# Altium PCB Sonar.PcbDoc
Units mil, origin at the board's own origin, x right, y up, seen from the top; angles counter-clockwise.
Board outline 6500 x 3000 mil, 2 copper layers (Top Layer, Bottom Layer); 61 components, 28 nets, 382 pads, 98 vias.
Unrouted connection lines stored in the file: 12.
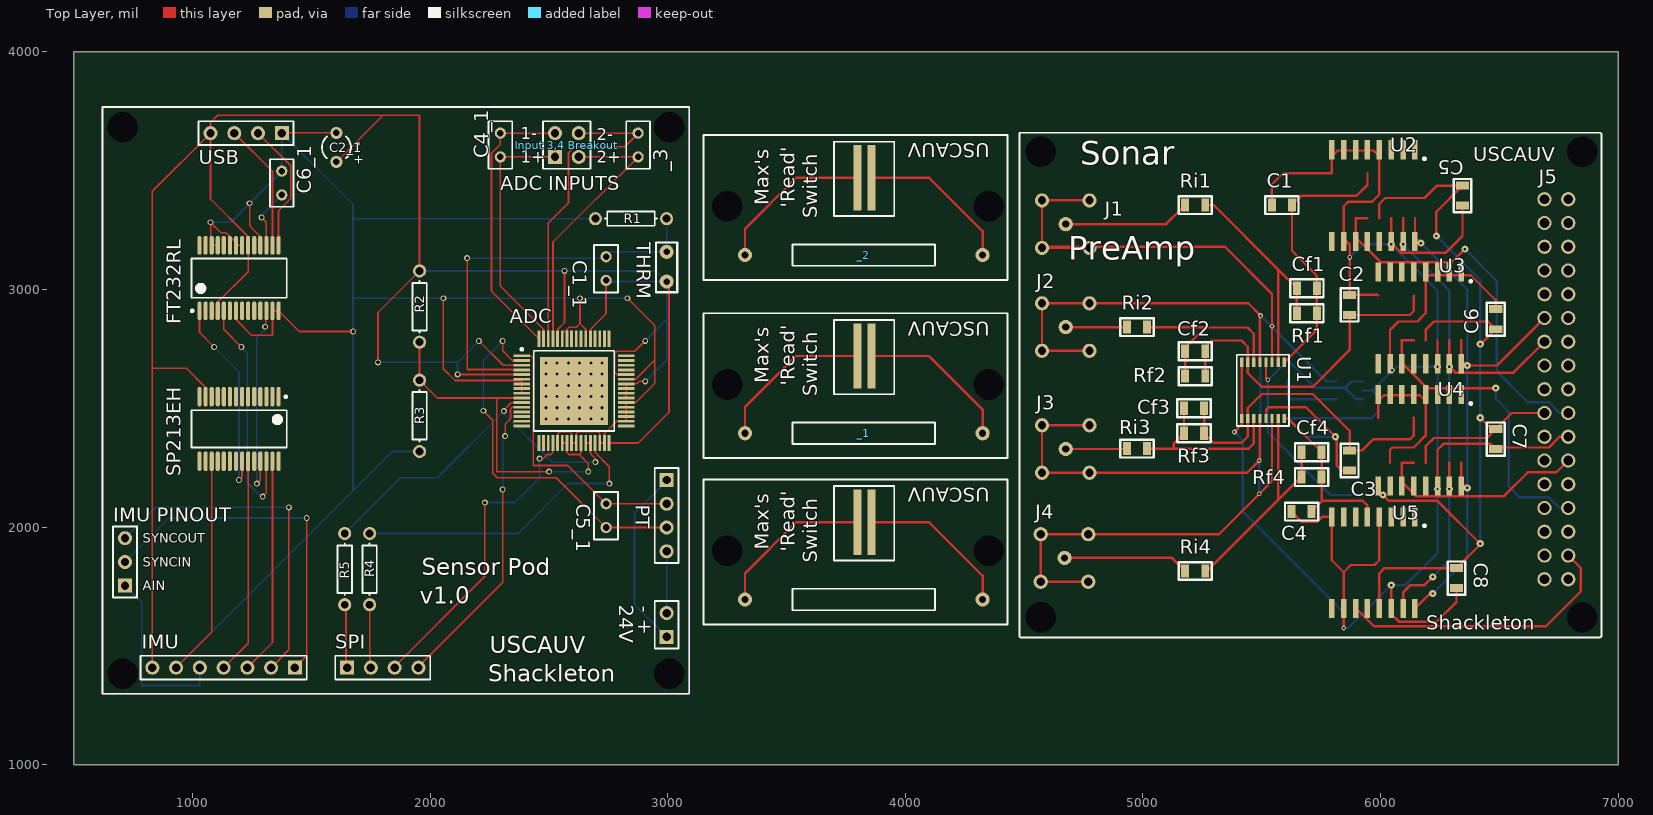
[diagram p0: Top Layer view]
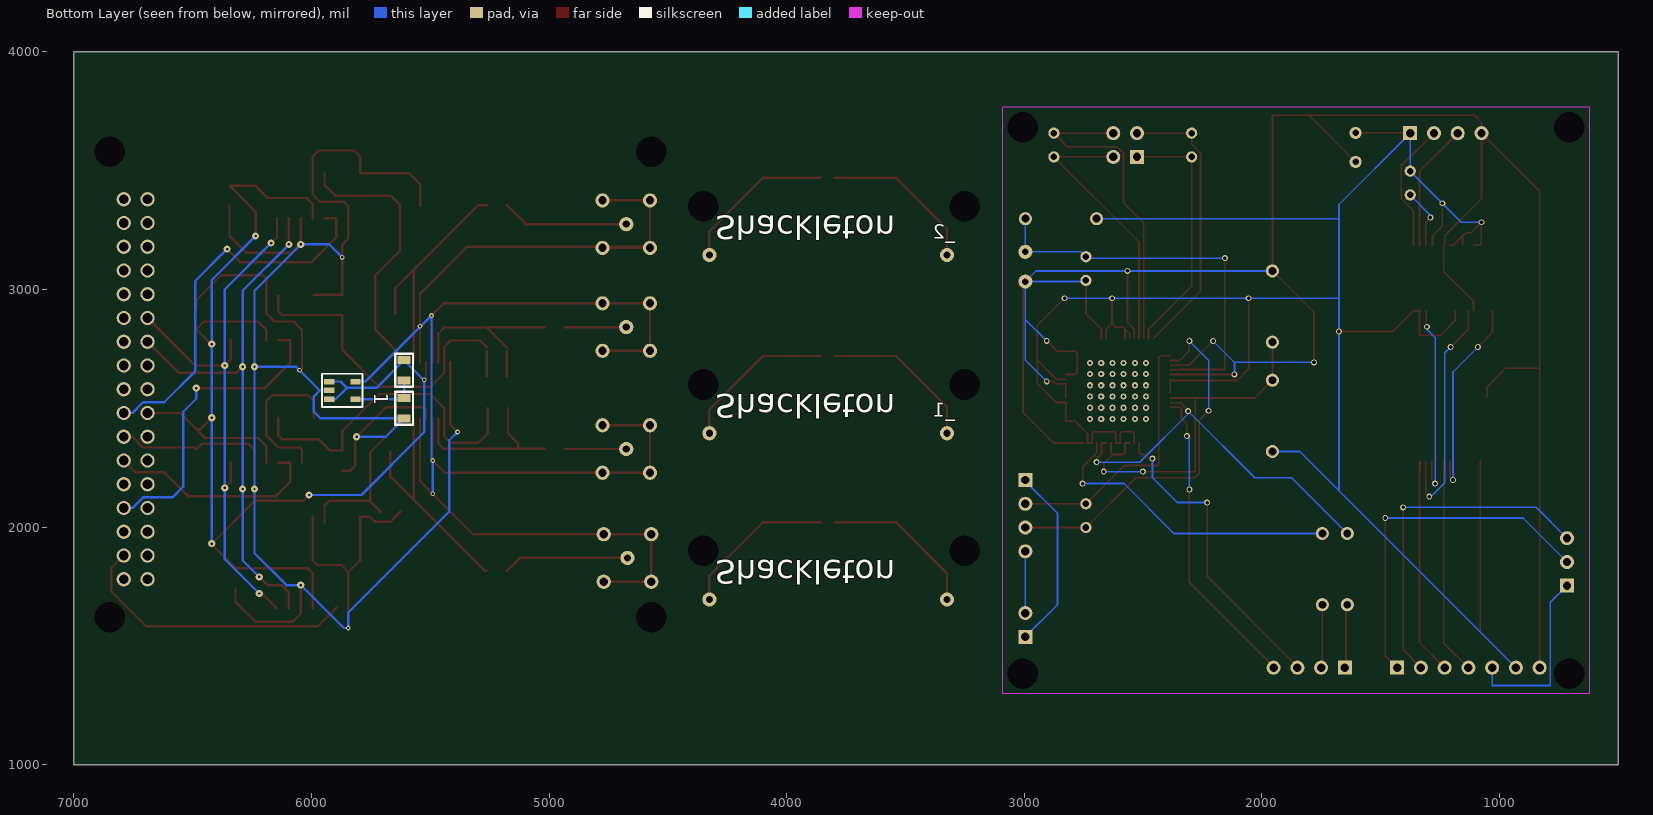
[diagram p1: Bottom Layer view, seen from below]

## Layer stack, top to bottom
Top Layer: signal copper 1.4
Dielectric: dielectric 12.6, FR-4, Dk 4.8
Bottom Layer: signal copper 1.4

## Board outline
500,1000 7000,1000 7000,4000 500,4000

## Design rules (kind name [scope] priority, off if disabled: settings)
Clearance [All] p1: gap=10
PolygonConnect [All] p1: connectstyle=Relief reliefconductorwidth=10 reliefentries=4 polygonreliefangle="90 Angle"
RoomDefinition Sonar [InComponentClass('Sonar')] p1: confinementstyle=ConfineIn formatcopy=TRUE lockcomponents=FALSE outline 7045,1060 11190,1060 11190,1260 7045,1260
RoutingVias [All] p1: holewidth=28 width=50 viastyle="Through Hole" minholewidth=28 minwidth=50 maxholewidth=28 maxwidth=50
SilkscreenOverComponentPads [All] p1: minsilkscreentomaskgap=10
SolderMaskExpansion [All] p1: expansion=4
Width [All] p1: maxlimit=10 minlimit=10 preferedwidth=10
27 further rules are at their usual default settings.

## Classes and differential pairs
component class Sonar: * C1 C2 C3 C4 C5 C6 C7 C8 Cf1 Cf2 Cf3 Cf4 J1 J2 J3 J4 J5 Rf1 Rf2 Rf3 Rf4 Ri1 Ri2 Ri3 Ri4 U1 U2 U4 U5

## Components (designator, comment, footprint, x,y, rotation, side; value= is the part's Value field where it differs from the comment)
1 "470K Ohm" "R 0805 (2012) RESISTOR" 5610,2500 r270 bottom (schematic designator Rf1)
"- +" "Header 2" HDR1X2 2995,1538 r90 top (schematic designator 24V)
_1 "" "MDCG-4 12-33" 3825,2395 r180 top
_2 "" "MDCG-4 12-33" 3825,3145 r180 top
_3 "Cap" RAD-0.1 2875,3608 r90 top (schematic designator C3)
ADC "ADC _ ADS1174" "ADC - ADS1174" 2605,2573 r0 top
C1 ".22uF" "0805 (2012) Capacitor" 5585,3355 r0 top
C1_1 "Cap" RAD-0.1 2740,3088 r270 top (schematic designator C1)
C2 ".22uF" "0805 (2012) Capacitor" 5870,2935 r270 top
C2_1 "Cap Pol1" R38 1605,3598 r180 top (schematic designator C2)
C3 ".22uF" "0805 (2012) Capacitor" 5870,2280 r90 top
C4 ".22uF" "0805 (2012) Capacitor" 5667.68,2065 r0 top
C4_1 "Cap" RAD-0.1 2295,3608 r90 top (schematic designator C4)
C5 "1uF" "0805 (2012) Capacitor" 6345,3395 r270 top
C5_1 "Cap" RAD-0.1 2740,2048 r90 top (schematic designator C5)
C6 "1uF" "0805 (2012) Capacitor" 6485,2875 r90 top
C6_1 "Cap" RAD-0.1 1375,3448 r270 top (schematic designator C6)
C7 "1uF" "0805 (2012) Capacitor" 6485,2370 r270 top
C8 "1uF" "0805 (2012) Capacitor" 6320,1785 r270 top
Cf1 ".1uF" "0805 (2012) Capacitor" 5690,3005 r0 top
Cf2 ".1uF" "0805 (2012) Capacitor" 5220,2740 r0 top
Cf3 ".1uF" "0805 (2012) Capacitor" 5215,2500 r0 top
Cf4 ".1uF" "0805 (2012) Capacitor" 5710,2315 r0 top
FT232RL "FT232RL" SSOP-28 1195,3048 r90 top (schematic designator RS232_to_USB)
IMU "Header 7" HDR1X7 1430,1408 r180 top (schematic designator IMU232Input)
IMU_BREAKOUT "Header 3" HDR1X3 715,1753 r90 top
"Input 3,4 Breakout" "Header 2X2" HDR2X2 2525,3558 r0 top
J1 "EPL.00.250.NTN" EPL.00.250.NTN_1 4675,3275 r0 top
J2 "EPL.00.250.NTN" EPL.00.250.NTN_1 4675,2841.67 r0 top
J3 "EPL.00.250.NTN" EPL.00.250.NTN_1 4675,2328.33 r0 top
J4 "EPL.00.250.NTN" EPL.00.250.NTN_1 4670,1870 r0 top
J5 "1001 34 G 00 B 1 A" 1001 6740,2580 r90 top
PT "Header 4" HDR1X4 2995,2198 r270 top (schematic designator Pressure_Transducer)
R1 "Res1" AXIAL-0.3 2845,3298 r0 top
R2 "Res1" AXIAL-0.3 1955,2928 r270 top
R3 "Res1" AXIAL-0.3 1955,2468 r270 top
R4 "Res1" AXIAL-0.3 1745,1823 r90 top
R5 "Res1" AXIAL-0.3 1640,1823 r90 top
Rf1 "0Ohm" "R 0805 (2012) RESISTOR" 5690,2900 r0 top
Rf1 "470K Ohm" "R 0805 (2012) RESISTOR" 5610,2660 r270 bottom
Rf2 "0Ohm" "R 0805 (2012) RESISTOR" 5220,2635 r0 top
Rf3 "0Ohm" "R 0805 (2012) RESISTOR" 5215,2395 r0 top
Rf4 "0Ohm" "R 0805 (2012) RESISTOR" 5710,2210 r0 top
Ri1 "0Ohm" "R 0805 (2012) RESISTOR" 5220,3355 r0 top
Ri2 "0Ohm" "R 0805 (2012) RESISTOR" 4975,2841.67 r0 top
Ri3 "0Ohm" "R 0805 (2012) RESISTOR" 4975,2330 r0 top
Ri4 "0Ohm" "R 0805 (2012) RESISTOR" 5220,1815 r0 top
SP213EH "SP213EH" SSOP-28(2) 1195,2413 r270 top (schematic designator Level_Converter)
SPI "Header 4" HDR1X4 1650,1408 r0 top (schematic designator SPI_OUT)
THRM "USP10981" Thermistor 2995,3003.41 r90 top (schematic designator Thermistor)
U1 "TLV2775" TlV2775AIPW 5505,2575 r270 top
U2 "PGA204" pGA204AU 5970,3395 r270 top
U3 "PGA204" pGA204AU 6165,2880 r270 top
U4 "PGA204" pGA204AU 6165,2365 r270 top (schematic designator U3)
U5 "PGA204" pGA204AU 5970,1850 r270 top
USB "Header 4" HDR1X4 1375,3658 r180 top (schematic designator USB_OUT)
? "" 5-1775443-2 3827,3470 r180 top
? "" 5-1775443-2 3827,2720 r180 top
? "" TC1071VCT713 5870,2575 r270 bottom
? "" 5-1775443-2 3827,2020 r180 top
? "" "MDCG-4 12-33" 3825,1695 r180 top

## Footprints (in the part's own frame and the unit in brackets; to place one, negate y for a bottom-side part, rotate by r counter-clockwise, add the part's x,y. Pads: shape width x height; smd on the part's side, far side on the other; paste and mask are expansions set on the pad)
5-1775443-2 [mm] "CONN HEADER 1.5MM 2 POS Vert SMD"
  rect 0.85x7 smd: 1(-0.75,0) 2(0.75,0)
  silkscreen extent -3.2,-3.86 3.25,4.09, body extent -2.25,-2.73 2.25,3.27, height 4.95
"0805 (2012) Capacitor" [mm] "0805 (2012) Capacitor"
  rect 0.85x1.4 smd: 1(-1.075,0) 2(1.075,0)
  silkscreen extent -1.78,-0.95 1.78,0.95, body extent -1.19,-0.65 1.19,0.65, height 0.85
1001 [mil] "OUPIIN"
  round 60 hole 40.94: 1(800,50) 2(700,50) 3(600,50) 4(500,50) 5(400,50) 6(300,50) 7(200,50) 8(100,50) 9(0,50) 10(-100,50) 11(-200,50) 12(-300,50) 13(-400,50) 14(-500,50) 15(-600,50) 16(-700,50) 17(-800,50) 18(800,-50) 19(700,-50) 20(600,-50) 21(500,-50) 22(400,-50) 23(300,-50) 24(200,-50) 25(100,-50) 26(0,-50) 27(-100,-50) 28(-200,-50) 29(-300,-50) 30(-400,-50) 31(-500,-50) 32(-600,-50) 33(-700,-50) 34(-800,-50)
"ADC - ADS1174" [mm] "TSQFP, 64-Leads, Body 12.2x12.2mm (max), Pitch 0.50mm, IPC Medium Density"
  rect 1.75x0.3 smd: 1(-5.575,3.75) 2(-5.575,3.25) 3(-5.575,2.75) 4(-5.575,2.25) 5(-5.575,1.75) 6(-5.575,1.25) 7(-5.575,0.75) 8(-5.575,0.25) 9(-5.575,-0.25) 10(-5.575,-0.75) 11(-5.575,-1.25) 12(-5.575,-1.75) 13(-5.575,-2.25) 14(-5.575,-2.75) 15(-5.575,-3.25) 16(-5.575,-3.75) 33(5.575,-3.75) 34(5.575,-3.25) 35(5.575,-2.75) 36(5.575,-2.25) 37(5.575,-1.75) 38(5.575,-1.25) 39(5.575,-0.75) 40(5.575,-0.25) 41(5.575,0.25) 42(5.575,0.75) 43(5.575,1.25) 44(5.575,1.75) 45(5.575,2.25) 46(5.575,2.75) 47(5.575,3.25) 48(5.575,3.75)
  rect 0.3x1.75 smd: 17(-3.75,-5.575) 18(-3.25,-5.575) 19(-2.75,-5.575) 20(-2.25,-5.575) 21(-1.75,-5.575) 22(-1.25,-5.575) 23(-0.75,-5.575) 24(-0.25,-5.575) 25(0.25,-5.575) 26(0.75,-5.575) 27(1.25,-5.575) 28(1.75,-5.575) 29(2.25,-5.575) 30(2.75,-5.575) 31(3.25,-5.575) 32(3.75,-5.575) 49(3.75,5.575) 50(3.25,5.575) 51(2.75,5.575) 52(2.25,5.575) 53(1.75,5.575) 54(1.25,5.575) 55(0.75,5.575) 56(0.25,5.575) 57(-0.25,5.575) 58(-0.75,5.575) 59(-1.25,5.575) 60(-1.75,5.575) 61(-2.25,5.575) 62(-2.75,5.575) 63(-3.25,5.575) 64(-3.75,5.575)
  rect 7.3x7.3 smd: 65(0,0)
  silkscreen extent -5.7,-4.3 4.3,4.57, body extent -6,-6 6,6, height 1.05
AXIAL-0.3 [mm] "Axial Device, Thru-Hole; 2 Leads; 0.3 in Pin Spacing"
  round 1.4 hole 0.85: 1(-3.81,0) 2(3.81,0)
  silkscreen extent -2.77,-0.76 2.77,0.76
EPL.00.250.NTN_1 [mil] "LEMO coax connector"
  round 60 hole 35.43: 1(-100,100) 2(100,100) 3(-100,-100) 4(100,-100)
  round 60 hole 30: 5(0,0)
HDR1X2 [mm] "Connector; Header; 2 Position"
  rect 1.5x1.5 hole 0.9: 1(0,0)
  round 1.5 hole 0.9: 2(2.54,0)
  silkscreen extent -1.27,-1.27 3.81,1.27
HDR1X3 [mm] "Connector; Header; 3 Position"
  rect 1.5x1.5 hole 0.9: 1(0,0)
  round 1.5 hole 0.9: 2(2.54,0) 3(5.08,0)
  silkscreen extent -1.27,-1.27 6.35,1.27
HDR1X4 [mm] "Connector; Header; 4 Position"
  rect 1.5x1.5 hole 0.9: 1(0,0)
  round 1.5 hole 0.9: 2(2.54,0) 3(5.08,0) 4(7.62,0)
  silkscreen extent -1.27,-1.27 8.89,1.27
HDR1X7 [mm] "Connector; Header; 7 Position"
  rect 1.5x1.5 hole 0.9: 1(0,0)
  round 1.5 hole 0.9: 2(2.54,0) 3(5.08,0) 4(7.62,0) 5(10.16,0) 6(12.7,0) 7(15.24,0)
  silkscreen extent -1.27,-1.27 16.51,1.27
HDR2X2 [mm] "Connector; Header; 2x2 Position"
  rect 1.5x1.5 hole 0.9: 1(0,0)
  round 1.5 hole 0.9: 2(0,2.54) 3(2.54,0) 4(2.54,2.54)
  silkscreen extent -1.27,-1.27 3.81,3.81
"MDCG-4 12-33" [mil] "SWITCH REED SPST .5A 12-33 A/T"
  round 60 hole 30: 1(-500,0) 2(500,0)
  silkscreen extent -300,-45 300,45
pGA204AU [mm] "SOIC, 8-Leads, Body 5.0x4.0mm (max), Pitch 1.27mm, IPC Medium Density"
  rect 2.05x0.584 smd: 1(-4.9,4.445) 2(-4.9,3.175) 3(-4.9,1.905) 4(-4.9,0.635) 5(-4.9,-0.635) 6(-4.9,-1.905) 7(-4.9,-3.175) 8(-4.9,-4.445) 9(4.9,-4.445) 10(4.9,-3.175) 11(4.9,-1.905) 12(4.9,-0.635) 13(4.9,0.635) 14(4.9,1.905) 15(4.9,3.175) 16(4.9,4.445)
  silkscreen extent -4.06,5.34 -3.81,5.59, body extent -5.15,-5.1 5.15,5.1, height 3.5
R38 [mm] "Crystal, Thru-Hole; 2 Leads; Body 3.1 x 8.2 mm (Dia.xH)"
  round 1.3 hole 0.7: 1(0,1.55) 2(0,-1.55)
  silkscreen extent -1.55,-1.19 1.55,1.17
"R 0805 (2012) RESISTOR" [mm] "0805 (2012) Resistor"
  rect 0.85x1.4 smd: 1(-1.075,0) 2(1.075,0)
  silkscreen extent -1.78,-0.95 1.78,0.95, body extent -1.19,-0.65 1.19,0.65, height 0.85
RAD-0.1 [mm] "Radial Cap, Thru-Hole; 2 Leads; 0.1 in Pin Spacing"
  round 1.2 hole 0.7: 1(-1.27,0) 2(1.27,0)
  silkscreen extent -2.54,-1.27 2.54,1.27
SSOP-28 [mm] "SOP, 28-Leads, Body 10.2x5.3mm (max), Pitch 0.65mm, IPC Medium Density"
  oval 2x0.45 smd: 1(-3.5,4.225) 2(-3.5,3.575) 3(-3.5,2.925) 4(-3.5,2.275) 5(-3.5,1.625) 6(-3.5,0.975) 7(-3.5,0.325) 8(-3.5,-0.325) 9(-3.5,-0.975) 10(-3.5,-1.625) 11(-3.5,-2.275) 12(-3.5,-2.925) 13(-3.5,-3.575) 14(-3.5,-4.225) 15(3.5,-4.225) 16(3.5,-3.575) 17(3.5,-2.925) 18(3.5,-2.275) 19(3.5,-1.625) 20(3.5,-0.975) 21(3.5,-0.325) 22(3.5,0.325) 23(3.5,0.975) 24(3.5,1.625) 25(3.5,2.275) 26(3.5,2.925) 27(3.5,3.575) 28(3.5,4.225)
  silkscreen extent -3.62,-5.1 2.1,5.12, body extent -2.65,-5.1 2.65,5.1, height 2
SSOP-28(2) [mm] "SOP, 28-Leads, Body 10.2x5.6mm (max), Pitch 0.65mm, IPC Medium Density"
  oval 2.1x0.45 smd: 1(-3.45,4.225) 2(-3.45,3.575) 3(-3.45,2.925) 4(-3.45,2.275) 5(-3.45,1.625) 6(-3.45,0.975) 7(-3.45,0.325) 8(-3.45,-0.325) 9(-3.45,-0.975) 10(-3.45,-1.625) 11(-3.45,-2.275) 12(-3.45,-2.925) 13(-3.45,-3.575) 14(-3.45,-4.225) 15(3.45,-4.225) 16(3.45,-3.575) 17(3.45,-2.925) 18(3.45,-2.275) 19(3.45,-1.625) 20(3.45,-0.975) 21(3.45,-0.325) 22(3.45,0.325) 23(3.45,0.975) 24(3.45,1.625) 25(3.45,2.275) 26(3.45,2.925) 27(3.45,3.575) 28(3.45,4.225)
  silkscreen extent -3.57,-5.1 2,5.13, body extent -2.8,-5.1 2.8,5.1, height 2
TC1071VCT713 [mm] "IC REG LDO ADJ .1A SOT23A-5"
  rect 0.6x1.1 smd: 1(-0.95,-1.4) 2(0,-1.4) 3(0.95,-1.4) 4(0.95,1.4) 5(-0.95,1.4)
  silkscreen extent -1.78,-2.16 1.78,2.16, body extent -1.5,-1.47 1.5,1.53, height 1.44
Thermistor [mm] "USP10981"
  round 1.5 hole 0.7: 0(0.762,0) 1(3.937,0)
TlV2775AIPW [mm] "IC OPAMP GP R-R 5.1MHZ 16TSSOP"
  rect 1x0.35 smd: 1(-3,2.275) 2(-3,1.625) 3(-3,0.975) 4(-3,0.325) 5(-3,-0.325) 6(-3,-0.975) 7(-3,-1.625) 8(-3,-2.275) 9(3,-2.275) 10(3,-1.625) 11(3,-0.975) 12(3,-0.325) 13(3,0.325) 14(3,0.975) 15(3,1.625) 16(3,2.275)
  silkscreen extent -3.81,-2.79 3.81,2.79, body extent -3.2,-2.5 3.2,2.5, height 1.1

## Part data
1 Rf1 Rf1 Rf2 Rf3 Rf4 Ri1 Ri2 Ri3 Ri4: library part Resistor, "Resistor"
"- +": "Header, 2-Pin"
_3 C1_1 C4_1 C5_1 C6_1: "Capacitor"
C1 C2 C3 C4 C5 C6 C7 C8 Cf1 Cf2 Cf3 Cf4: library part "Capacitor (non-polarized)", "Capacitor"
C2_1: "Polarized Capacitor (Radial)"
IMU: "Header, 7-Pin"
IMU_BREAKOUT: "Header, 3-Pin"
"Input 3,4 Breakout": "Header, 2-Pin, Dual row"
PT SPI USB: "Header, 4-Pin"
R1 R2 R3 R4 R5: "Resistor"
U1: "2.7 V High-Slew-Rate Rail-to-Rail Output Operation Amplifer with ShutDown"

## Free pads (board coordinates)
  round 110 hole 128.5 mask+1: 0(3005,1383) 0(3250,1900) 0(3250,2600) 0(3250,3350) 0(4350,1900) 0(4350,2600) 0(4350,3350) 0(4570,1620) 0(4570,3580) 0(6850,1620) 0(6850,3580) 1(3005,3683) 2(705,3683) 3(705,1383)

## Via types
v1: diameter 25.98, hole 12.99, Top Layer to Bottom Layer, tented top, 36 vias
v2: diameter 25, hole 15, Top Layer to Bottom Layer, 33 vias
v3: diameter 30, hole 10, Top Layer to Bottom Layer, 20 vias
v4: diameter 20, hole 10, Top Layer to Bottom Layer, 9 vias

## Nets (pads, with @x,y where several pads share a name; then routed paths per layer and width w, separated by ;. In a path a pad name is that pad's centre, name@x,y a point inside that pad or via, vN(x,y) a via of type N, cw(c..) or ccw(c..) an arc to the next point about the centre after c; other vN are vias at no path point)
1.65V: ?.5 J1.1 J1.2 J1.3 J1.4 J2.1 J2.2 J2.3 J2.4 J3.1 J3.2 J3.3 J3.4 J4.1 J4.2 J4.3 J4.4 U1.3 U1.5 U1.12 U1.14 | length 8312
  Top Layer w10: J1.3@4575,3180 5345,3180 5543.39,2981.61 v4(5543.39,2845) ; J4.4@4775,1770 J4.3 J4.1 J4.2 5320,1970 v4(5490,2140) 5543.39,2193.39 U1.14 ; J3.4 J3.3 ; J3.2 J3.1 J3.3 ; J2.4 J2.3 J2.1 ; J2.2 J2.1 ; J1.4 J1.3 J1.1 J1.2 ; v4(5490,2280) 5438.33,2228.33 J3.3 ; v4@5492.21,2282.21 U1.12 ; U1.5 5492.2,2892.8 5443.33,2941.67 J2.1 ; v4@5540,2845 v4(5543.39,2845) ; U1.3 v4(5543.39,2845)
  Bottom Layer w10: v4(5490,2140) v4(5490,2280) 5495,2285 v4(5495,2890) 5772.6,2612.4 ?.5
+3.3V: ?.1@5925.12,2612.4 ?.3 C5.1 C6.1 C7.1 C8.1 J5.10 Rf1.1@5610,2702.32 U1.4 U2.13 U3.13 U4.13 U5.13 | length 5841.2
  Top Layer w10: U1.4 5517.8,2627.2 v4(5525,2620) ; U5.13 5995,1805 6017.32,1827.32 C8.1 v3@6422.68,1930 ; 5995,3300.51 5995,3360 6020,3385 6185,3385 6237.32,3437.32 C5.1 6235,3327.32 v3(6235,3225) ; v3(6010,2135) 6035,2110 6240,2110 v3(6420,1930) ; 6190,2270.51 6190,2340 6225,2375 6447.68,2375 C7.1 ; 6190,2785.51 6190,2830 6225,2865 6452.68,2865 C6.1 6422.32,2770 v3(6420,2770) ; v3(6420,2460) 6467.68,2412.32 C7.1 ; J5.10 6552.68,2480 C7.1
  Bottom Layer w10: ?.3 5898.58,2537.6 5850.59,2585.59 ; ?.1@5925.12,2612.4 5877.4,2612.4 5850.59,2585.59 ; v3(6010,2135) 5790,2135 5525,2400 5525,2617.32 5610,2702.32 5726.73,2585.59 5850.59,2585.59 ; v3(6235,3225) 6420,3040 v3(6420,2770) v3(6420,2460) v3(6420,1930)
A0: J5.7 U2.15 U3.15 U4.15 U5.15 | length 2525.3
  Top Layer w10: U5.15 6095,1725 6125.51,1755.51 6185.51,1755.51 v3(6220,1790) ; v3(6095,3190) 6095,3300.51 ; v3(6290,2160) 6290,2270.51 ; 6290,2785.51 v3(6290,2675) 6315,2650 6560,2650 J5.7
  Bottom Layer w10: v3(6095,3190) 6290,2995 v3(6290,2675) v3(6290,2160) 6290,1860 v3(6220,1790)
A1: J5.6 U2.16 U3.16 U4.16 U5.16 | length 2472.3
  Top Layer w10: U5.16 6207.91,1720 v3(6220,1720) ; 6145,3300.51 6145,3220 v3(6170,3195) ; 6340,2270.51 6340,2190 v3(6365,2165) ; 6340,2785.51 6340,2705 v3(6365,2680) 6490,2680 J5.6
  Bottom Layer w10: v3(6170,3195) 6365,3000 v3(6365,2680) v3(6365,2165) 6365,1865 v3(6220,1720)
adj: 1.1 ?.4 Rf1.2@5610,2617.68 | length 282.2
  Bottom Layer w10: Rf1.2@5610,2617.68 1.1 5614.72,2537.6 ?.4
AUDIN1: J5.33 U5.11 U5.12 | length 1214.4
  Top Layer w10: U5.11@5895,1660 5973.27,1581.73 6695.73,1581.73 6843,1729 6843,1827 J5.33
AUDIN2: J5.31 U3.11 U3.12 | length 1309.1
  Top Layer w10: 6140,2785.51 6090,2785.51 6090,2690 6195,2585 v3(6485,2585)
  Bottom Layer w10: v3(6485,2585) 6485,2540 6540,2485 6540,2170 6585,2125 6708.64,2125 6753.64,2080 J5.31
AUDIN3: J5.29 U4.11 U4.12 | length 917.5
  Top Layer w10: 6140,2270.51 6090,2270.51 6090,2190 6150,2130 6520,2130 6620,2230 6740,2230 J5.29
AUDIN4: J5.27 U2.11 U2.12 | length 1600.2
  Top Layer w10: 5945,3300.51 5895,3300.51 5895,3220 6000,3115 6300,3115 v3(6355,3170)
  Bottom Layer w10: v3(6355,3170) 6490,3035 6490,2655 6620,2525 6708.64,2525 6753.64,2480 J5.27
GND: 1.2 ?.2@5925.12,2575 C1.1 C2.1 C3.1 C4.1 C5.2 C6.2 C7.2 C8.2 J5.28 J5.30 J5.32 J5.34 U1.8 U1.9 U1.13 U2.4 U2.8 U2.10 U2.14 U3.4 U3.8 U3.10 U3.14 U4.4 U4.8 U4.10 U4.14 U5.4 U5.8 U5.10 U5.14 | length 11096.8
  Top Layer w10: v4(5385,2400) 5415.43,2430.43 U1.9 U1.8 ; U1.13 5517.8,2492.8 5530,2505 5685,2505 v3(5810,2380) 5815,2375 5815,2260 5837.32,2237.68 C3.1 ; C1.1 5542.68,3442.68 5589.49,3489.49 5795,3489.49 5795,3560 5820,3585 5970,3585 5995,3560 5995,3400 5965,3370 5865,3370 5845,3350 5845,3215 5870,3190 C2.1 5987.17,2977.32 5990,2974.49 ; C4.1 5667.91,2022.44 5732.95,2022.44 5753.42,2042.91 U5.8 5795,1860 5845,1810 ; v4(5845,1575) U5.10 5845,1810 ; 5990,2459.49 5990,2530 6015,2555 6165,2555 6190,2530 6190,2385 6140,2335 6050,2335 6040,2325 6040,2270.51 ; U5.4 5995,1860 5975,1840 5875,1840 5845,1810 ; v3(6045,1755.51) U5.14 6045,1634.02 6077.29,1601.73 6236.73,1601.73 6320,1685 C8.2 ; 6045,3300.51 v3(6045,3190) 6050,3190 6085,3155 6275,3155 6345,3225 C5.2 ; v4(6050,2660) 6040,2670 6040,2830 6075,2865 6155,2865 6190,2900 6190,3045 6205,3060 6380,3060 6485,2955 C6.2 ; v3(6240,2160) 6240,2325 6265,2350 6462.68,2350 C7.2 6492.32,2335 6708.64,2335 6753.64,2380 J5.28 ; v3(6240,2675) 6240,2785.51
  Bottom Layer w10: v4(5385,2400) 5420,2365 5420,2065 5845,1640 v4(5845,1575) 5864.49,1575 v3(6045,1755.51) 6105.51,1755.51 6240,1890 v3(6240,2160) v3(6240,2675) ; v3(5810,2380) 5687.68,2380 1.2 5962.68,2457.68 5990,2485 5990,2550 5965,2575 ; v4(5870,3135) 5925,3190 v3(6045,3190) 6240,2995 v3(6240,2675) ; ?.2@5925.12,2575 5965,2575 ; 5965,2575 6065,2675 v3(6240,2675)
K1: ?.1@3856.53,2020 ?.1@4325,1695 | length 661.7
  Top Layer w10: ?.1@3856.53,2020 4100,2020 4325,1795 ?.1@4325,1695
K2: ?.2@3325,1695 ?.2@3797.47,2020 | length 671.5
  Top Layer w10: ?.2@3325,1695 3325,1805 3540,2020 ?.2@3797.47,2020
K3: 
K4: 
K5: 
K6: 
"Net C3_2": C3.2 Cf3.2 Rf3.2 U1.10 U4.5 | length 1406.8
  Top Layer w10: Cf3.2 Rf3.2 5297.32,2355 5415,2355 5441.02,2381.02 U1.10 5441.02,2501.02 5500,2560 5715,2560 5870,2405 C3.2 5922.32,2322.32 5970,2370 6125,2370 6140,2385 6140,2459.49
NetC1_2: C1.2 Cf1.2 Rf1.2@5732.32,2900 U1.1 U2.5 | length 1164.8
  Top Layer w10: U1.1 5732.32,2830.87 5732.32,2900 Cf1.2 5732.32,3057.68 5627.32,3162.68 C1.2 5667.32,3395 5900,3395 5945,3440 5945,3489.49
NetC2_2: C2.2 Cf2.2 Rf2.2 U1.7 U3.5 | length 1422.9
  Top Layer w10: Rf2.2 Cf2.2 ; Cf2.2@5262.32,2757.32 5290,2785 5415,2785 5441.02,2758.98 U1.7 5441.02,2648.98 5500,2590 5715,2590 5870,2745 C2.2 6122.68,2892.68 6140,2910 6140,2974.49
NetC4_2: C4.2 Cf4.2 Rf4.2 U1.16 U5.5 | length 758.8
  Top Layer w10: U1.16 5610.43,2456.89 Cf4.2 Rf4.2 5752.32,2107.32 ; C4.2 5752.32,2107.32 ; U5.5@5945,2017.32 U5.5 5945,2090 5925,2110 5755,2110 5752.32,2107.32
NetCf1_1: Cf1.1 Rf1.1@5647.68,2900 Ri1.2 U1.2 | length 1025.9
  Top Layer w10: Ri1.2 5297.68,3355 5568.98,3083.7 ; U1.2 5568.98,3083.7 ; Rf1.1@5647.68,2900 Cf1.1 5568.98,3083.7
NetCf2_1: Cf2.1 Rf2.1 Ri2.2 U1.6 | length 806
  Top Layer w10: Ri2.2 5260.66,2841.67 5262.32,2840 ; Rf2.1 Cf2.1 ; Cf2.1@5177.68,2755.35 5262.32,2840 ; U1.6 5466.61,2813.39 5440,2840 5262.32,2840
NetCf3_1: Cf3.1 Rf3.1 Ri3.2 U1.11 | length 751.2
  Top Layer w10: Ri3.2 5130,2330 ; Cf3.1 Rf3.1 5130,2352.32 5130,2330 ; U1.11 5466.62,2351.62 5445,2330 5130,2330
NetCf4_1: Cf4.1 Rf4.1 Ri4.2 U1.15 | length 1016.9
  Top Layer w10: Ri4.2 5270,1815 5568.98,2113.98 ; U1.15 5568.98,2113.98 ; Cf4.1 Rf4.1 5665,2210 5568.98,2113.98
NetJ1_5: J1.5 Ri1.1 | length 535.8
  Top Layer w10: J1.5 5097.68,3275 Ri1.1
NetJ2_5: J2.5 Ri2.1 | length 257.7
  Top Layer w10: J2.5 Ri2.1
NetJ3_5: J3.5 Ri3.1 | length 258.4
  Top Layer w10: J3.5 4931.01,2328.33 Ri3.1
NetJ4_5: J4.5 Ri4.1 | length 530.5
  Top Layer w10: J4.5 5122.68,1870 Ri4.1
pads on no net: "- +.1" "- +.2" "Input 3,4 Breakout.1" "Input 3,4 Breakout.2" "Input 3,4 Breakout.3" "Input 3,4 Breakout.4" ?.1@3856.53,2720 ?.1@3856.53,3470 ?.2@3797.47,2720 ?.2@3797.47,3470 _1.1 _1.2 _2.1 _2.2 _3.1 _3.2 ADC.1 ADC.2 ADC.3 ADC.4 ADC.5 ADC.6 ADC.7 ADC.8 ADC.9 ADC.10 ADC.11 ADC.12 ADC.13 ADC.14 ADC.15 ADC.16 ADC.17 ADC.18 ADC.19 ADC.20 ADC.21 ADC.22 ADC.23 ADC.24 ADC.25 ADC.26 ADC.27 ADC.28 ADC.29 ADC.30 ADC.31 ADC.32 ADC.33 ADC.34 ADC.35 ADC.36 ADC.37 ADC.38 ADC.39 ADC.40 ADC.41 ADC.42 ADC.43 ADC.44 ADC.45 ADC.46 ADC.47 ADC.48 ADC.49 ADC.50 ADC.51 ADC.52 ADC.53 ADC.54 ADC.55 ADC.56 ADC.57 ADC.58 ADC.59 ADC.60 ADC.61 ADC.62 ADC.63 ADC.64 ADC.65 C1_1.1 C1_1.2 C2_1.1 C2_1.2 C4_1.1 C4_1.2 C5_1.1 C5_1.2 C6_1.1 C6_1.2 FT232RL.1 FT232RL.2 FT232RL.3 FT232RL.4 FT232RL.5 FT232RL.6 FT232RL.7 FT232RL.8 FT232RL.9 FT232RL.10 FT232RL.11 FT232RL.12 FT232RL.13 FT232RL.14 FT232RL.15 FT232RL.16 FT232RL.17 FT232RL.18 FT232RL.19 FT232RL.20 FT232RL.21 FT232RL.22 FT232RL.23 FT232RL.24 FT232RL.25 FT232RL.26 FT232RL.27 FT232RL.28 IMU.1 IMU.2 IMU.3 IMU.4 IMU.5 IMU.6 IMU.7 IMU_BREAKOUT.1 IMU_BREAKOUT.2 IMU_BREAKOUT.3 J5.1 J5.2 J5.3 J5.4 J5.5 J5.8 J5.9 J5.11 J5.12 J5.13 J5.14 J5.15 J5.16 J5.17 J5.18 J5.19 J5.20 J5.21 J5.22 J5.23 J5.24 J5.25 J5.26 PT.1 PT.2 PT.3 PT.4 R1.1 R1.2 R2.1 R2.2 R3.1 R3.2 R4.1 R4.2 R5.1 R5.2 SP213EH.1 SP213EH.2 SP213EH.3 SP213EH.4 SP213EH.5 SP213EH.6 SP213EH.7 SP213EH.8 SP213EH.9 SP213EH.10 SP213EH.11 SP213EH.12 SP213EH.13 SP213EH.14 SP213EH.15 SP213EH.16 SP213EH.17 SP213EH.18 SP213EH.19 SP213EH.20 SP213EH.21 SP213EH.22 SP213EH.23 SP213EH.24 SP213EH.25 SP213EH.26 SP213EH.27 SP213EH.28 SPI.1 SPI.2 SPI.3 SPI.4 THRM.0 THRM.1 U2.1 U2.2 U2.3 U2.6 U2.7 U2.9 U3.1 U3.2 U3.3 U3.6 U3.7 U3.9 U4.1 U4.2 U4.3 U4.6 U4.7 U4.9 U5.1 U5.2 U5.3 U5.6 U5.7 U5.9 USB.1 USB.2 USB.3 USB.4
copper on no net: | length 51270.8
  Top Layer w7: 830,1408 830,2668 ; 930,1408 1079.84,1557.84 1079.84,2277.17 1076.61,2273.94 ; 1028.66,2910.2 1028.66,2819.34 v2(1090,2758) ; 1054.25,2548.83 1051.02,2552.06 1051.02,2590.57 973.59,2668 830,2668 ; v2(1075,3283) v2@1076.61,3281.39 ; 1105.43,2910.2 1108.67,2913.44 1108.67,2949.98 1233.39,3074.7 1233.39,3185.8 1230.15,3189.03 1230.15,3225.57 1075,3380.72 1075,3658 ; 1105.43,3185.8 1079.84,3185.8 1076.61,3189.03 v2@1076.61,3281.39 ; 1130,1408 1233.39,1511.39 1233.39,2277.17 1230.15,2273.94 1230.15,2235.43 ; 1131.02,2910.2 1131.02,2831.98 v2(1205,2758) ; 1156.61,3185.8 1153.38,3189.03 1153.38,3225.57 ; 1175,3658 1335.75,3497.25 1335.75,3185.8 ; 1182.2,2910.2 1185.44,2906.97 1185.44,2870.43 1247.87,2808 1335,2808 1335.75,2808.75 1335.75,2910.2 1361.34,2910.2 1448.54,2823 v2(1675,2823) ; v2(1195,2198) 1207.8,2210.8 1207.8,2277.17 ; 1207.8,3185.8 1193.15,3185.8 1153.38,3225.57 ; 1230,1408 1335.75,1513.75 1335.75,2277.17 1332.52,2273.94 1332.52,2235.43 ; v2(1240,3363) 1240,3266.9 1281.33,3225.57 1281.33,3189.03 1284.57,3185.8 ; 1275,3658 1412.12,3520.88 1412.12,3382.62 1361.34,3331.84 1361.34,3185.8 ; v2@1278.38,2191.38 1284.57,2197.57 1284.57,2277.17 ; v2(1290,3303) 1310.16,3282.84 1310.16,3185.8 ; v2(1295,2128) 1310,2143 1310,2199 1310.16,2199.16 1310.16,2277.17 ; v2(1305,2843) 1306.93,2844.93 1306.93,2906.97 1310.16,2910.2 ; 1330,1408 1405,1483 v2(1405,2083) ; 1375,3658 1376.02,3659.02 1605,3659.02 ; 1430,1408 1480,1458 v2(1480,2038) ; 1605,3536.98 1800,3731.98 1800,3733 ; 1640,1673 1645,1668 1645,1408 ; 1745,1408 1745,1673 ; v2(1780,2693) 1780,2903 1955,3078 1955,3733 1800,3733 ; 1845,1408 2230,1793 v2(2230,2103) ; 1945,1408 2305,1768 v2(2305,2158) ; 1955,2778 1955,2618 2029.53,2543.47 2280,2543.47 ; v2(2055,2963) 2055,2666.23 2104.23,2617 2380.3,2617 2385.51,2622.21 ; v2(2115,2643) 2116.1,2641.9 2385.51,2641.9 ; v2(2155,3132) 2155,2663 2344.33,2663 2345.47,2661.86 2385.23,2661.86 2385.51,2661.58 ; v2(2205,2783) 2306.73,2681.27 2385.51,2681.27 ; v2(2223.38,2489.62) 2263,2450 2263,2225.96 2281.96,2207 2531,2207 2740,1998 2995,1998 ; v2@2304,2482.04 2304,2486.39 2341.11,2523.51 2385.23,2523.51 2385.51,2523.79 ; v2(2305,2783) 2305,2741.7 2345.47,2701.23 2385.23,2701.23 2385.51,2700.95 2385.23,2700.67 ; v2(2315,2383) 2315,2433.59 2337.56,2456.15 2337.56,2495.91 2345.47,2503.82 2385.23,2503.82 2385.51,2504.1 ; 2385.23,2622.49 2385.51,2622.21 ; 2385.51,2543.47 2280,2543.47 ; 2385.51,2563.16 2385.51,2582.84 2385.51,2602.53 2385.51,2622.21 ; 2385.51,2720.64 2385.79,2720.36 2425.55,2720.36 2433.46,2712.45 2433.46,2259.54 2435,2258 2436,2259 2579,2259 2740,2098 2995,2098 ; 2457.36,2792.49 2257.88,2991.97 2257.88,3573.38 2295,3610.5 2295,3658 2525,3658 ; v2@2470,2283 2492.56,2305.56 2508.23,2305.56 2516.14,2313.47 2516.14,2353.23 2516.42,2353.51 ; 2477.05,2792.49 2476.77,2792.77 2476.77,2832.53 2295,3014.3 2295,3558 2525,3558 ; 2496.73,2792.49 2496.73,3279.73 2581.97,3364.97 2581.97,3575.82 2607.18,3601.03 2818.03,3601.03 2875,3658 2625,3658 ; v2@2505,2238 v2(2500,2233) 2280,2233 2280,2543.47 ; 2516.42,2792.49 2516.7,2792.77 2516.7,3199.7 2875,3558 2625,3558 ; 2536.1,2353.51 2536.38,2353.79 2536.38,2393.55 2544.29,2401.46 2586.97,2401.46 2594.88,2393.55 2594.88,2353.79 2595.16,2353.51 2614.84,2353.51 2615.12,2353.79 2615.12,2393.55 2623.03,2401.46 2705.08,2401.46 2712.99,2393.55 2712.99,2353.79 2713.27,2353.51 2732.95,2353.51 2733.23,2353.79 2733.23,2393.55 2784.45,2444.77 2824.21,2444.77 2824.49,2445.05 2824.49,2464.73 2824.49,2484.42 2824.49,2504.1 2824.49,2523.79 2824.77,2524.07 2864.53,2524.07 2945,2604.54 2945,2702.96 ; 2536.1,2792.49 2536.38,2792.77 2536.38,2832.53 2565,2861.15 v2(2565,3078) ; 2555.79,2353.51 2575.47,2353.51 2575.75,2353.23 2575.75,2313.47 2583.66,2305.56 2626.9,2305.56 ; 2555.79,2792.49 2555.79,2812.56 2575.75,2832.53 ; 2575.47,2792.49 2575.75,2792.77 2575.75,2832.53 ; v2(2630,2963) 2630,2856.46 ; 2634.53,2353.51 2634.81,2353.23 2634.81,2313.47 2626.9,2305.56 ; 2654.21,2353.51 2673.9,2353.51 2674.18,2353.23 2674.18,2309.11 2695,2288.29 v2(2695,2273) ; 2654.21,2792.49 2653.93,2792.77 2653.93,2832.53 2630,2856.46 ; v2(2665,2233) 2665,2267.46 2626.9,2305.56 ; 2673.9,2792.49 2674.18,2792.77 2674.18,2832.53 2740,2898.35 2740,3038 2744.59,3033.41 ; 2693.58,2353.51 2693.86,2353.23 2693.86,2313.47 2754,2253.33 v2(2754,2183) ; 2752.64,2353.51 2875.51,2353.51 3005,2483 3005,3023.41 2995,3033.41 ; 2824.49,2543.47 2824.49,2563.16 2824.49,2582.84 2824.49,2602.53 2824.77,2602.81 2868.89,2602.81 2879.08,2613 v2(2905,2613) ; 2824.49,2622.21 2824.77,2622.49 2864.53,2622.49 2945,2702.96 ; 2824.49,2641.9 2824.21,2642.18 2784.45,2642.18 2776.54,2650.09 2776.54,2732.14 2784.45,2740.04 2861.04,2740.04 v2(2905,2784) ; v2(2830,2963) 2945,2848 2945,2702.96 ; 830,2668 830,3413 1075,3658 ; 1075,3658 1075,3703 1105,3733 1800,3733 ; v2@1076.61,3281.39 1119.33,3238.67 1140.28,3238.67 1153.38,3225.57 ; 2575.75,2832.53 2583.66,2840.44 2613.98,2840.44 2630,2856.46
  Top Layer w10: 3325,2395 3325,2505 3540,2720 3797.47,2720 ; 3325,3145 3325,3255 3540,3470 3797.47,3470 ; 3856.53,2720 4100,2720 4325,2495 4325,2395 ; 3856.53,3470 4100,3470 4325,3245 4325,3145
  Bottom Layer w7: 715,1753 785,1683 785,1333 1030,1333 1030,1408 ; 715,1853 900,2038 v2(1480,2038) ; 715,1953 845,2083 v2(1405,2083) ; 930,1408 1675,2153 ; v2(1075,3283) 1160,3283 v2(1240,3363) 1375,3498 1375,3658 1675,3358 1675,3298 ; v2(1090,2758) 1195,2653 v2(1195,2198) ; v2(1205,2758) 1230,2733 1230,2186.23 1288.23,2128 v2(1295,2128) ; v2(1270,2183) 1270,2798 v2@1305,2833 ; v2(1290,3303) 1290,3313 1375,3398 ; 1640,1973 1875,2208 2030,2208 v2@2304,2482 ; 1745,1973 2370,1973 2580,2183 v2(2754,2183) ; v2(1780,2693) 2115,2693 ; 1955,2318 1840,2318 1675,2153 ; 1955,3078 v2(2565,3078) 2950.41,3078 2995,3033.41 ; v2(2115,2643) 2115,2693 ; v2(2155,3132) 2734,3132 2740,3138 2760.41,3158.41 2995,3158.41 2995,3298 ; v2(2205,2783) 2115,2693 ; v2(2223.38,2489.62) 2223.38,2701.38 v2(2305,2783) ; v2(2230,2103) 2355,2103 2460,2208 v2(2460,2288) ; v2@2304,2482.04 v2@2304.04,2482 ; v2(2305,2158) v2@2305,2383 ; v2@2305,2482 v2@2304.04,2482 ; v2(2500,2233) v2(2665,2233) ; v2(2695,2273) 2513.04,2273 v2@2304.04,2482 ; 2695,3298 1675,3298 ; 2740,3038 2744.59,3033.41 2995,3033.41 ; v2(2830,2963) v2(2630,2963) v2(2055,2963) 1675,2963 ; v2(2905,2613) 2995,2703 2995,2874 ; v2(2905,2784) 2995,2874 ; 2995,1538 2860,1673 2860,2058 2995,2193 2995,2198 ; 2995,1638 2995,1898 ; 1675,2153 v2(1675,2823) 1675,2963 ; 1675,2963 1675,3298 ; 2995,2874 2995,3033.41
  other v1: 2486.89,2454.89 2534.13,2454.89 2581.38,2454.89 2628.62,2454.89 2675.87,2454.89 2723.11,2454.89 2486.89,2502.13 2534.13,2502.13 2581.38,2502.13 2628.62,2502.13 2675.87,2502.13 2723.11,2502.13 2486.89,2549.38 2534.13,2549.38 2581.38,2549.38 2628.62,2549.38 2675.87,2549.38 2723.11,2549.38 2486.89,2596.62 2534.13,2596.62 2581.38,2596.62 2628.62,2596.62 2675.87,2596.62 2723.11,2596.62 2486.89,2643.87 2534.13,2643.87 2581.38,2643.87 2628.62,2643.87 2675.87,2643.87 2723.11,2643.87 2486.89,2691.11 2534.13,2691.11 2581.38,2691.11 2628.62,2691.11 2675.87,2691.11 2723.11,2691.11
  other v2: 2310,2488

## Keep-outs
Keep-Out Layer:
  lines w0: 620,1298 3090,1298 3090,3768 620,3768 620,1298

## Silkscreen, mask and mechanical layers (free items; w line width, h text height)
Top Overlay:
  lines w7.87: 4480,1540 4480,3660 6925,3660 6930,3655 6930,1540 6925,1535 4485,1535 ; 620,1298 3090,1298 3090,3768 620,3768 620,1298 ; 3150,1590 3150,2200 4430,2200 4430,1590 3150,1590 ; 3150,2290 4430,2290 4430,2900 3150,2900 3150,2290 ; 3150,3040 4430,3040 4430,3650 3150,3650 3150,3040
  lines w10: 2950,2988 3040,2988 3040,3198 2950,3198 2950,2988
  text "USCAUV" at 4355,3615 h60 r180
  text "USCAUV" at 6390,3540 h60
  text "Sonar" at 4735,3525 h100
  text "+  -" at 1715,3523 h40 r90
  text "ADC INPUTS" at 2295,3418 h60
  text "Max's" at 3425,3355 h60 r90
  text "'Read'" at 3535,3345 h60 r90
  text "Switch" at 3630,3300 h60 r90
  text "PreAmp" at 4685,3125 h100
  text "USCAUV" at 4355,2865 h60 r180
  text "Max's" at 3425,2605 h60 r90
  text "'Read'" at 3535,2595 h60 r90
  text "Switch" at 3630,2550 h60 r90
  text "USCAUV" at 4355,2165 h60 r180
  text "IMU PINOUT" at 665,2023 h60
  text "SYNCOUT" at 790,1933 h40
  text "Max's" at 3425,1905 h60 r90
  text "'Read'" at 3535,1895 h60 r90
  text "Switch" at 3630,1850 h60 r90
  text "SYNCIN" at 790,1833 h40
  text "Sensor Pod" at 1965,1798 h70
  text "AIN" at 790,1733 h40
  text "v1.0" at 1955,1678 h70
  text "24V" at 2795,1673 h60 r270
  text "Shackleton" at 6192,1567 h60
  text "USCAUV" at 2250,1468 h70
  text "Shackleton" at 2245,1348 h70
Bottom Overlay:
  text "Shackleton" at 4300,3310 h100 r180
  text "Shackleton" at 4300,2560 h100 r180
  text "Shackleton" at 4300,1860 h100 r180

## Text inside footprints (layer, text, board x,y; h text height)
"Input 3,4 Breakout": Top Overlay "2+" at 2700,3533 h50; Top Overlay "2-" at 2700,3628 h50; Top Overlay "1-" at 2380,3633 h50; Top Overlay "1+" at 2380,3533 h50